# Altium PCB PCB_EPM7064SLC44_2.PCBDOC (part 2 of 2)
Units mil, origin at the board's own origin, x right, y up, seen from the top; angles counter-clockwise.
Board outline 2000 x 2000 mil, 2 copper layers (Top Layer, Bottom Layer); 30 components, 43 nets, 175 pads, 47 vias.
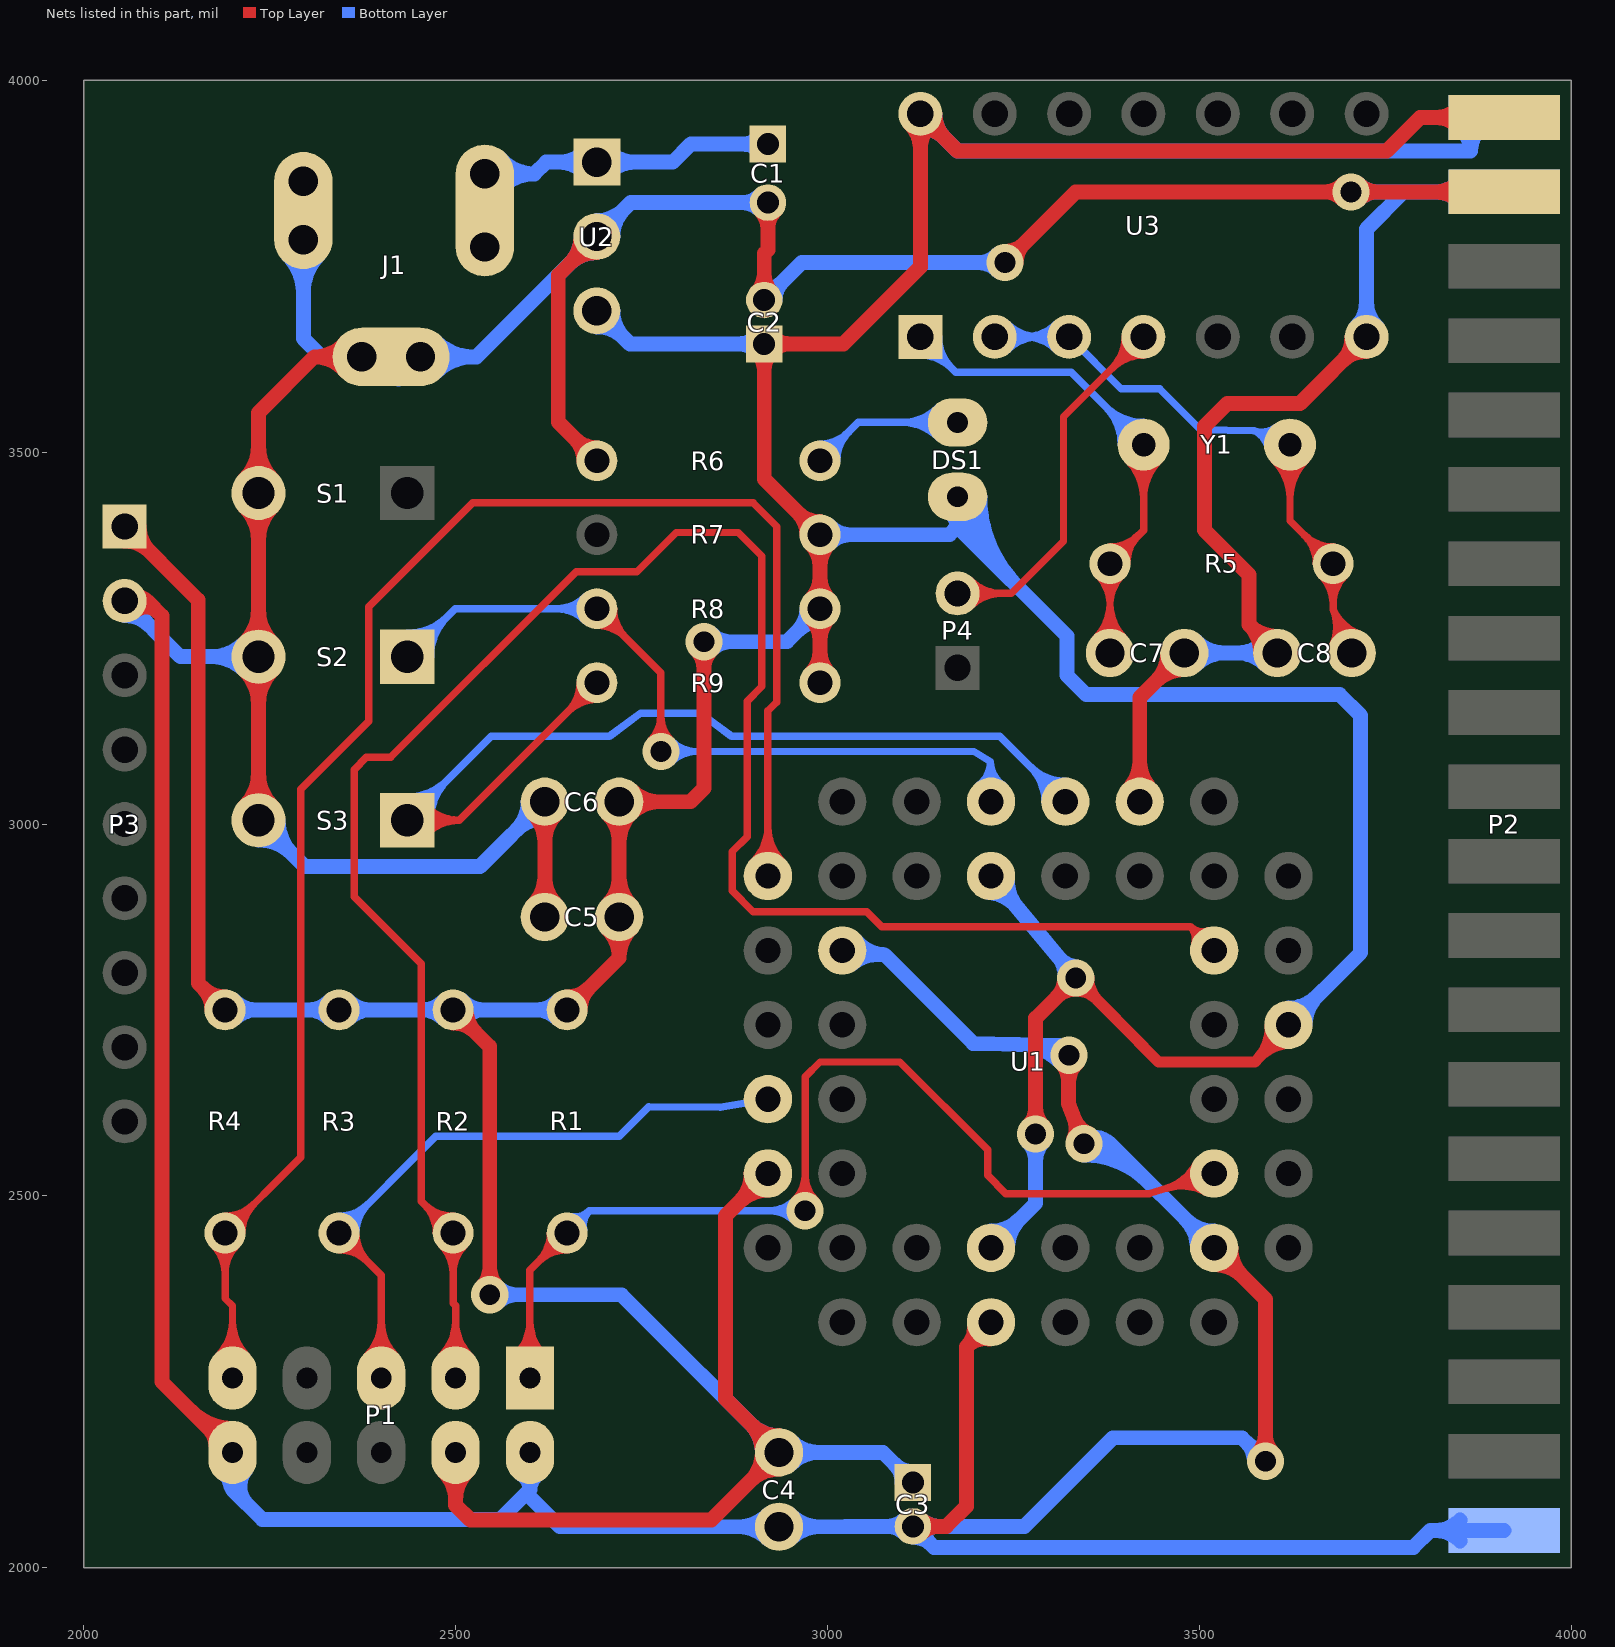
[diagram p2: the nets of this part, all layers, seen from the top]

## Via types
v1: diameter 50, hole 28, Top Layer to Bottom Layer, 47 vias

## Nets (pads, with @x,y where several pads share a name; then routed paths per layer and width w, separated by ;. In a path a pad name is that pad's centre, name@x,y a point inside that pad or via, vN(x,y) a via of type N, cw(c..) or ccw(c..) an arc to the next point about the centre after c; other vN are vias at no path point) (continued)
GND: C1.2 C2.2 C3.2 C4.1 C5.1 C6.1 C7.1 C8.1 J1.2 J1.2A J1.2B J1.3 J1.3A J1.3B P1.2 P1.10 P2.2 P2.22 P2.40 P3.2 R6.2 S1.2 S2.2 S3.2 U1.10 U1.22 U1.30 U1.42 U2.2 U3.7 | length 16637.8
  Top Layer w20: P3.2@2054.68,3300.35 cw(c2069.65,3284.11) 2085.27,3299.73 ; P3.2@2054.88,3300.46 cw(c2065.7,3259.79) 2095.45,3289.55 ; P3.2@2055,3300 2085,3300 ; P3.2@2068.24,3285.64 cw(c2083.78,3268.78) 2100,3285 ; P3.2@2072.86,3292.1 cw(c2085,3286.72) 2085,3300 ; P3.2@2072.86,3307.9 ccw(c2085,3313.28) 2085,3300 ; 2144.52,2210.48 ccw(c2200,2265.96) P1.10@2200,2187.5 ; 2168.66,2186.34 cw(c2147.32,2165) P1.10@2177.5,2165 ; P1.10@2200,2155 2105,2250 2105,3280 2085,3300 ; S3.2@2216.32,3023.68 ccw(c2171.22,3068.78) 2235,3068.78 ccw(c2298.78,3068.78) S3.2@2253.68,3023.68 ; S2.2@2216.32,3206.32 cw(c2171.22,3161.22) 2235,3161.22 cw(c2298.78,3161.22) S2.2@2253.68,3206.32 ; S2.2@2216.32,3243.68 ccw(c2171.22,3288.78) 2235,3288.78 ccw(c2298.78,3288.78) S2.2@2253.68,3243.68 ; S1.2@2216.32,3426.32 cw(c2171.22,3381.22) 2235,3381.22 cw(c2298.78,3381.22) S1.2@2253.68,3426.32 ; S1.2@2216.32,3463.68 ccw(c2171.22,3508.78) 2235,3508.78 ccw(c2298.78,3508.78) S1.2@2253.68,3463.68 ; S3.2@2235,3005 S2.2@2235,3225 S1.2@2235,3445 2235,3553 2310.15,3628.15 ; J1.2A@2275.64,3805.36 2295.28,3785.72 J1.2@2295.28,3825 ; J1.2A@2281.47,3799.44 ccw(c2248.13,3832.77) 2295.28,3832.77 ccw(c2342.42,3832.77) J1.2A@2309.08,3799.44 ; J1.2B@2281.47,3850.56 cw(c2248.13,3817.23) 2295.28,3817.23 cw(c2342.42,3817.23) J1.2B@2309.08,3850.56 ; J1.2B@2315.14,3844.86 2295.45,3864.55 2295.28,3864.72 J1.2B@2295.28,3864.37 J1.2@2295.28,3825 ; J1.3A@2351.72,3609.03 ccw(c2310.15,3573.4) 2310.15,3628.15 ; J1.3A@2351.72,3647.27 cw(c2310.15,3682.9) 2310.15,3628.15 ; J1.3A@2360.21,3614.34 ccw(c2326.87,3581.01) 2326.87,3628.15 ccw(c2326.87,3675.29) J1.3A@2360.21,3641.96 ; J1.3A@2389.56,3616.33 cw(c2413.38,3598.23) J1.3@2413.39,3628.15 ; J1.3A@2389.56,3639.97 ccw(c2413.38,3658.07) J1.3@2413.39,3628.15 ; J1.3B@2437.21,3616.33 ccw(c2413.39,3598.23) J1.3@2413.39,3628.15 ; J1.3B@2437.21,3639.97 cw(c2413.39,3658.07) J1.3@2413.39,3628.15 ; J1.3B@2438.95,3614.34 ccw(c2405.61,3581.01) 2405.61,3628.15 ccw(c2405.61,3675.29) J1.3B@2438.95,3641.96 ; C5.1@2604.1,2890.9 ccw(c2565.73,2929.27) 2620,2929.27 ccw(c2674.27,2929.27) C5.1@2635.9,2890.9 ; C6.1@2604.1,3014.1 cw(c2565.73,2975.73) 2620,2975.73 cw(c2674.27,2975.73) C6.1@2635.9,3014.1 ; C5.1@2620,2875 C6.1@2620,3030 ; U2.2@2668.5,3790 cw(c2616.61,3790) 2653.3,3753.3 cw(c2690,3716.61) U2.2@2690,3768.5 ; R6.2@2672.44,3488.46 ccw(c2630.05,3488.46) 2660.02,3518.44 ccw(c2690,3548.41) R6.2@2690,3506.02 ; R6.2@2690,3488.46 2638,3540.46 2638,3738 U2.2@2690,3790 ; C2.2@2904.67,3714.86 ccw(c2879.74,3739.79) 2915,3739.79 ccw(c2950.26,3739.79) C2.2@2925.33,3714.86 ; C1.2@2909.67,3825.3 cw(c2884.74,3800.37) 2920,3800.37 cw(c2955.26,3800.37) C1.2@2930.33,3825.3 ; C2.2@2915,3704.53 2915,3767 2920,3772 C1.2@2920,3835.63 ; C3.2@3115,2055.47 3160,2055.47 3187,2082.47 3187,2297 ; C3.2@3125.33,2045.14 cw(c3150.26,2020.21) 3150.26,2055.47 cw(c3150.26,2090.73) C3.2@3125.33,2065.8 ; U1.22@3197.64,2327.46 cw(c3160.74,2323.27) 3187,2297 ; U1.22@3217.46,2307.64 ccw(c3213.27,2270.74) 3187,2297 ; U1.22@3220,2330 3187,2297 ; v1(3239,3755) 3333.65,3849.65 v1(3704,3850) P2.2@3910,3850 ; v1@3239,3770 ccw(c3239,3806.21) 3264.61,3780.61 ccw(c3290.21,3755) v1@3254,3755 ; v1@3314.23,2678.53 cw(c3288.23,2653.32) 3324.44,2652.77 cw(c3360.65,2652.21) v1@3335.44,2678.21 ; v1(3325,2688.97) 3324,2624 v1(3345,2570) ; v1@3331.27,2576.04 ccw(c3298.12,2590.63) 3331.87,2603.75 ccw(c3365.63,2616.88) v1@3351.04,2583.73 ; U1.42@3404.09,3045.91 ccw(c3365.68,3084.32) 3420,3084.32 ccw(c3474.32,3084.32) U1.42@3435.91,3045.91 ; U1.42@3420,3030 3420,3170 C7.1@3480,3230 ; C7.1@3457.52,3230 cw(c3403.25,3230) 3441.62,3191.62 cw(c3480,3153.25) C7.1@3480,3207.52 ; U1.30@3520,2407.5 cw(c3520,2353.18) 3558.41,2391.59 cw(c3596.82,2430) U1.30@3542.5,2430 ; U1.30@3520,2430 3589,2361 v1(3589,2143) ; v1@3578.39,2153.61 ccw(c3552.79,2179.21) 3589,2179.21 ccw(c3625.21,2179.21) v1@3599.61,2153.61 ; C8.1@3582.52,3230.16 ccw(c3529.54,3230.53) 3567,3268 ; C8.1@3604.84,3252.48 cw(c3604.47,3305.46) 3567,3268 ; C8.1@3605,3230 3567,3268 ; v1@3693.4,3839.38 ccw(c3667.82,3813.75) 3667.79,3849.97 ccw(c3667.75,3886.18) v1@3693.38,3860.6 ; U3.7@3705.47,3655 cw(c3658.33,3655) 3691.66,3621.66 cw(c3725,3588.33) U3.7@3725,3635.47 ; v1@3714.61,3839.39 cw(c3740.21,3813.79) 3740.21,3850 cw(c3740.21,3886.21) v1@3714.61,3860.61 ; U3.7@3725,3655 3635.47,3565.47 3537.65,3565.47 3507.04,3534.86 3507.04,3395.09 3567,3335.13 3567,3268 ; P2.2@3850.86,3835.86 ccw(c3816.72,3801.72) 3816.72,3850 ccw(c3816.72,3898.28) P2.2@3850.86,3864.14 ; J1.2@2295.28,3825 cw(c2265.36,3825) 2283.46,3801.18 ccw(c2265.36,3825) J1.2@2295.28,3825 ; J1.2@2295.28,3825 ccw(c2325.2,3825) 2307.09,3801.18 cw(c2325.2,3825) J1.2@2295.28,3825 ; J1.2@2295.28,3825 cw(c2325.2,3825) 2307.09,3848.82 ccw(c2325.2,3825) J1.2@2295.28,3825 ; J1.2@2295.28,3825 ccw(c2265.36,3825) 2283.46,3848.82 cw(c2265.36,3825) J1.2@2295.28,3825 ; 2310.15,3628.15 J1.3A@2374.02,3628.15 J1.3@2413.39,3628.15
  Bottom Layer w20: P3.2@2055,3280.47 cw(c2055,3233.33) 2088.34,3266.66 cw(c2121.67,3300) P3.2@2074.53,3300 ; P3.2@2055,3300 2130,3225 S2.2@2235,3225 ; P1.10@2200,2155 2200,2105 ; P1.10@2201.95,2143.43 ccw(c2226.87,2123.37) 2204.25,2100.75 ; S2.2@2216.32,3206.32 ccw(c2171.22,3161.22) 2171.22,3225 ccw(c2171.22,3288.78) S2.2@2216.32,3243.68 ; P1.10@2217.53,2130.89 ccw(c2244.32,2109.32) 2220,2085 ; S3.2@2235,2978.58 cw(c2235,2914.81) 2280.1,2959.9 cw(c2325.19,3005) S3.2@2261.42,3005 ; S3.2@2235,3005 2297.24,2942.76 2532.76,2942.76 C6.1@2620,3030 ; J1.2A@2274.51,3764.86 cw(c2224.37,3714.72) 2295.28,3714.72 cw(c2366.18,3714.72) J1.2A@2316.04,3764.86 ; J1.2A@2281.47,3771.82 cw(c2248.13,3738.49) 2295.28,3738.49 cw(c2342.42,3738.49) J1.2A@2309.08,3771.82 ; J1.2B@2281.47,3850.56 cw(c2248.13,3817.23) 2295.28,3817.23 cw(c2342.42,3817.23) J1.2B@2309.08,3850.56 ; J1.2A@2283.46,3801.18 ccw(c2265.36,3825) J1.2@2295.28,3825 ; J1.2B@2283.46,3848.82 cw(c2265.36,3825) J1.2@2295.28,3825 ; J1.2A@2307.09,3801.18 cw(c2325.2,3825) J1.2@2295.28,3825 ; J1.2B@2307.09,3848.82 ccw(c2325.2,3825) J1.2@2295.28,3825 ; J1.3A@2349.36,3612.18 ccw(c2320,3593.17) 2320,3628.15 ; J1.3A@2349.36,3644.12 cw(c2320,3663.13) 2320,3628.15 ; J1.3A@2360.21,3614.34 ccw(c2326.87,3581.01) 2326.87,3628.15 ccw(c2326.87,3675.29) J1.3A@2360.21,3641.96 ; J1.3A@2373.97,3628.62 cw(c2377.58,3593.15) J1.3@2402.79,3618.36 ; J1.3A@2384.43,3611.63 cw(c2396.58,3592.36) J1.3@2412.68,3608.47 ; J1.3A@2387.82,3614.34 cw(c2421.16,3581.01) 2421.16,3628.15 cw(c2421.16,3675.29) J1.3A@2387.82,3641.96 ; J1.3A@2393,3628.15 2403.19,3617.96 J1.3@2423.07,3598.07 ; J1.3B@2438.95,3614.34 ccw(c2405.61,3581.01) 2405.61,3628.15 ccw(c2405.61,3675.29) J1.3B@2438.95,3641.96 ; J1.3B@2466.56,3614.34 cw(c2499.9,3581.01) 2499.9,3628.15 cw(c2499.9,3675.29) J1.3B@2466.56,3641.96 ; J1.3B@2473.52,3607.38 cw(c2523.66,3557.24) 2523.66,3628.15 cw(c2523.66,3699.06) J1.3B@2473.52,3648.92 ; P1.2@2588.32,2125.77 cw(c2575.7,2105) 2600,2105 ; C6.1@2597.52,3030 cw(c2543.25,3030) 2581.62,2991.62 cw(c2620,2953.25) C6.1@2620,3007.52 ; P1.2@2600,2155 2600,2105 ; P1.2@2611.68,2125.77 ccw(c2624.3,2105) 2600,2105 ; U2.2@2668.5,3790 cw(c2616.61,3790) 2653.3,3753.3 cw(c2690,3716.61) U2.2@2690,3768.5 ; U2.2@2690,3811.5 ccw(c2690,3863.39) 2726.7,3826.7 ccw(c2763.39,3790) U2.2@2711.5,3790 ; C1.2@2909.67,3825.3 ccw(c2884.74,3800.37) 2884.74,3835.63 ccw(c2884.74,3870.89) C1.2@2909.67,3845.96 ; C2.2@2915,3704.53 2965.47,3755 v1(3239,3755) ; C2.2@2915,3719.13 ccw(c2915,3754.4) 2939.93,3729.46 ccw(c2964.87,3704.53) C2.2@2929.61,3704.53 ; C4.1@2919.1,2039.1 ccw(c2880.73,2000.73) 2880.73,2055 ccw(c2880.73,2109.27) C4.1@2919.1,2070.9 ; C1.2@2920,3835.63 2735.63,3835.63 U2.2@2690,3790 2528.15,3628.15 2320,3628.15 ; C4.1@2950.9,2039.1 cw(c2989.27,2000.73) 2989.27,2055 cw(c2989.27,2109.27) C4.1@2950.9,2070.9 ; U1.10@3020,2830 3077,2824 3196,2705 3311.47,2702.5 v1(3325,2688.97) ; U1.10@3034.16,2812.51 cw(c3068.33,2770.29) 3074.02,2824.31 cw(c3079.71,2878.33) U1.10@3037.49,2844.16 ; C3.2@3104.67,2045.14 ccw(c3079.74,2020.21) 3079.74,2055.47 ccw(c3079.74,2090.73) C3.2@3104.67,2065.8 ; C3.2@3115,2040.87 cw(c3115,2005.6) 3139.93,2030.54 cw(c3164.87,2055.47) C3.2@3129.61,2055.47 ; C3.2@3125.33,2045.14 cw(c3150.26,2020.21) 3150.26,2055.47 cw(c3150.26,2090.73) C3.2@3125.33,2065.8 ; v1@3228.39,3744.39 ccw(c3202.79,3718.79) 3202.79,3755 ccw(c3202.79,3791.21) v1@3228.39,3765.61 ; 3257.15,2703.68 cw(c3255.39,2622.31) v1@3314.17,2678.6 ; v1@3342.31,2574.22 cw(c3358.54,2548.77) 3379.89,2570.11 ; v1@3345,2555 cw(c3345,2434.29) 3430.36,2519.64 ; v1(3345,2570) 3380,2570 ; v1@3345,2575 cw(c3345,2502.57) 3396.21,2553.79 ; v1@3353.07,2557.35 cw(c3372.26,2527.26) 3397.5,2552.5 ; v1@3355.86,2559.66 cw(c3380,2536.67) 3380,2570 ; v1@3355.86,2580.34 ccw(c3380,2603.33) 3380,2570 ; C7.1@3480,3230 C8.1@3605,3230 ; C7.1@3495.9,3214.1 cw(c3534.27,3175.73) 3534.27,3230 cw(c3534.27,3284.27) C7.1@3495.9,3245.9 ; U1.30@3497.5,2430 ccw(c3443.18,2430) 3481.59,2468.41 ccw(c3520,2506.82) U1.30@3520,2452.5 ; U1.30@3520,2430 3380,2570 ; v1@3574,2143 ccw(c3537.79,2143) 3563.39,2168.61 ccw(c3589,2194.21) v1@3589,2158 ; v1(3589,2143) 3557.32,2174.68 3384.13,2174.68 3264.92,2055.47 C3.2@3115,2055.47 ; C8.1@3589.1,3214.1 ccw(c3550.73,3175.73) 3550.73,3230 ccw(c3550.73,3284.27) C8.1@3589.1,3245.9 ; v1(3704,3850) 3775,3850 ; U3.7@3711.19,3668.81 ccw(c3677.86,3702.14) 3725,3702.14 ccw(c3772.14,3702.14) U3.7@3738.81,3668.81 ; v1@3714.61,3839.39 cw(c3740.21,3813.79) 3740.21,3850 cw(c3740.21,3886.21) v1@3714.61,3860.61 ; U3.7@3725,3655 3725,3800 3775,3850 ; P2.40@3850.86,2035.86 ccw(c3816.72,2001.72) 3816.72,2050 ccw(c3816.72,2098.28) P2.40@3850.86,2064.14 ; P2.22@3850.86,3835.86 ccw(c3816.72,3801.72) 3816.72,3850 ccw(c3816.72,3898.28) P2.22@3850.86,3864.14 ; P2.40@3910,2050 3810.69,2050 3788,2027.31 3143.17,2027.31 C3.2@3115,2055.47 ; P2.22@3910,3850 3775,3850 ; 2200,2105 cw(c2224.3,2105) 2211.68,2125.77 ccw(c2224.3,2105) 2200,2105 ; 2200,2105 ccw(c2175.7,2105) 2188.32,2125.77 cw(c2175.7,2105) 2200,2105 ; 2200,2105 2240,2065 2560,2065 2595,2100 ; J1.2@2295.28,3825 J1.2A@2295.28,3785.63 2295.28,3652.87 2320,3628.15 ; 2595,2100 2640,2055 C4.1@2935,2055 3024,2055 3024.47,2055.47 C3.2@3115,2055.47 ; 2595,2100 2600,2105
NetC1_1: C1.1 J1.1 J1.1A J1.1B U2.1 | length 1037.4
  Top Layer w20: J1.1A@2525.56,3789.6 ccw(c2492.23,3822.93) 2539.37,3822.93 ccw(c2586.51,3822.93) J1.1A@2553.18,3789.6 ; J1.1B@2525.56,3860.4 cw(c2492.23,3827.07) 2539.37,3827.07 cw(c2586.51,3827.07) J1.1B@2553.18,3860.4 ; J1.1A@2539.37,3775.79 J1.1@2539.37,3825 J1.1B@2539.37,3874.21
  Bottom Layer w20: J1.1B@2539.37,3874.21 2606,3874.21 ; J1.1B@2553.18,3860.4 cw(c2586.51,3827.07) 2586.51,3874.21 cw(c2586.51,3921.36) J1.1B@2553.18,3888.02 ; J1.1B@2561.05,3854.4 cw(c2606,3813.32) 2606,3874.21 ; J1.1B@2561.05,3894.03 ccw(c2606,3935.1) 2606,3874.21 ; U2.1@2674.8,3874.8 ccw(c2638.1,3838.1) 2638.1,3890 ccw(c2638.1,3941.9) U2.1@2674.8,3905.2 ; U2.1@2705.2,3874.8 cw(c2741.9,3838.1) 2741.9,3890 cw(c2741.9,3941.9) U2.1@2705.2,3905.2 ; C1.1@2909.67,3904.04 ccw(c2884.74,3879.11) 2884.74,3914.37 ccw(c2884.74,3949.63) C1.1@2909.67,3924.7 ; C1.1@2920,3914.37 2816.37,3914.37 2792,3890 U2.1@2690,3890 2621.79,3890 2606,3874.21
NetC7_2: C7.2 R5.1 U3.1 Y1.1 | length 1623.2
  Top Layer w10: C7.2@3360.57,3249.43 ccw(c3313.66,3296.34) 3380,3296.34 ccw(c3446.34,3296.34) C7.2@3399.43,3249.43 ; R5.1@3364.05,3334.05 cw(c3325.54,3295.54) 3380,3295.54 cw(c3434.46,3295.54) R5.1@3395.95,3334.05 ; C7.2@3367.64,3242.36 ccw(c3337.8,3272.2) 3380,3272.2 ccw(c3422.2,3272.2) C7.2@3392.36,3242.36 ; R5.1@3371.12,3341.12 cw(c3349.68,3319.68) 3380,3319.68 cw(c3410.32,3319.68) R5.1@3388.88,3341.12 ; C7.2@3380,3230 R5.1@3380,3350 3425.19,3395.19 Y1.1@3425.19,3510.09 ; R5.1@3380,3362.56 ccw(c3380,3392.88) 3401.44,3371.44 ccw(c3422.88,3350) R5.1@3392.56,3350 ; R5.1@3380,3372.56 ccw(c3380,3427.02) 3418.51,3388.51 ccw(c3457.02,3350) R5.1@3402.56,3350 ; Y1.1@3403.98,3488.88 cw(c3352.76,3437.67) 3425.19,3437.67 cw(c3497.62,3437.67) Y1.1@3446.4,3488.88 ; Y1.1@3411.05,3495.95 cw(c3376.91,3461.81) 3425.19,3461.81 cw(c3473.47,3461.81) Y1.1@3439.33,3495.95
  Bottom Layer w10: U3.1@3125,3630.47 cw(c3125,3571.26) 3166.87,3613.13 cw(c3208.74,3655) U3.1@3149.53,3655 ; U3.1@3125,3640.47 cw(c3125,3605.4) 3149.8,3630.2 cw(c3174.6,3655) U3.1@3139.53,3655 ; U3.1@3125,3655 3172.5,3607.5 3327.78,3607.5 Y1.1@3425.19,3510.09 ; Y1.1@3395.19,3510.09 ccw(c3322.76,3510.09) 3373.98,3561.31 ccw(c3425.19,3612.52) Y1.1@3425.19,3540.09 ; Y1.1@3405.19,3510.09 ccw(c3356.91,3510.09) 3391.05,3544.24 ccw(c3425.19,3578.38) Y1.1@3425.19,3530.09
NetC8_2: C8.2 R5.2 U3.2 U3.3 Y1.2 | length 1782.7
  Top Layer w10: Y1.2@3600.83,3488.88 cw(c3549.61,3437.67) 3622.04,3437.67 cw(c3694.47,3437.67) Y1.2@3643.25,3488.88 ; Y1.2@3607.9,3495.95 cw(c3573.76,3461.81) 3622.04,3461.81 cw(c3670.32,3461.81) Y1.2@3636.18,3495.95 ; Y1.2@3622.04,3510.09 3622.04,3407.96 R5.2@3680,3350 3680,3289 ; R5.2@3657.44,3350 ccw(c3602.98,3350) 3641.49,3388.51 ccw(c3680,3427.02) R5.2@3680,3372.56 ; R5.2@3664.05,3334.05 cw(c3625.54,3295.54) 3680,3295.54 cw(c3734.46,3295.54) R5.2@3695.95,3334.05 ; R5.2@3667.44,3350 ccw(c3637.12,3350) 3658.56,3371.44 ccw(c3680,3392.88) R5.2@3680,3362.56 ; R5.2@3671.12,3341.12 cw(c3649.68,3319.68) 3680,3319.68 cw(c3710.32,3319.68) R5.2@3688.88,3341.12 ; C8.2@3679.79,3240.94 ccw(c3623.87,3265.21) 3680,3289 ; C8.2@3688.97,3236.96 ccw(c3653.39,3252.4) 3689.1,3267.53 ccw(c3724.8,3282.66) C8.2@3711.15,3246.36 ; C8.2@3705,3230 3680,3289 ; C8.2@3714.67,3255.72 cw(c3736.13,3312.78) 3680,3289
  Bottom Layer w10: U3.2@3225,3655 U3.3@3325,3655 3395,3585 3447,3585 3502.14,3529.86 3573,3529 ; U3.2@3235.27,3644.73 cw(c3260.07,3619.93) 3260.07,3655 cw(c3260.07,3690.07) U3.2@3235.27,3665.27 ; U3.2@3242.34,3637.66 cw(c3284.21,3595.79) 3284.21,3655 cw(c3284.21,3714.21) U3.2@3242.34,3672.34 ; U3.3@3307.66,3637.66 ccw(c3265.79,3595.79) 3265.79,3655 ccw(c3265.79,3714.21) U3.3@3307.66,3672.34 ; U3.3@3314.73,3644.73 ccw(c3289.93,3619.93) 3289.93,3655 ccw(c3289.93,3690.07) U3.3@3314.73,3665.27 ; Y1.2@3592.45,3505.15 ccw(c3561.84,3500.04) 3573,3529 ; Y1.2@3602.31,3506.8 ccw(c3581.91,3503.39) 3589.35,3522.7 ccw(c3596.79,3542) Y1.2@3609.63,3525.78 ; Y1.2@3603.42,3533.62 cw(c3584.17,3557.96) 3573,3529 ; Y1.2@3622.04,3510.09 3573,3529
NetDS1_2: DS1.2 R6.1 | length 510.2
  Bottom Layer w10: R6.1@2990,3488.46 3041.54,3540 DS1.2@3175,3540 ; R6.1@2990,3501.02 ccw(c2990,3531.34) 3011.44,3509.9 ccw(c3032.88,3488.46) R6.1@3002.56,3488.46 ; R6.1@2990,3511.02 ccw(c2990,3565.49) 3028.51,3526.97 ccw(c3067.02,3488.46) R6.1@3012.56,3488.46 ; DS1.2@3148.05,3520.55 ccw(c3101.11,3473.61) 3101.11,3540 ccw(c3101.11,3606.39) DS1.2@3148.05,3559.45 ; DS1.2@3155.13,3527.63 ccw(c3125.25,3497.75) 3125.25,3540 ccw(c3125.25,3582.25) DS1.2@3155.13,3552.37
NetP1_1: P1.1 R1.2 U1.32 | length 2066.1
  Top Layer w10: P1.1@2580.55,2284.45 ccw(c2533.61,2331.39) 2600,2331.39 ccw(c2666.39,2331.39) P1.1@2619.45,2284.45 ; P1.1@2587.63,2277.37 ccw(c2557.75,2307.25) 2600,2307.25 ccw(c2642.25,2307.25) P1.1@2612.37,2277.37 ; P1.1@2600,2255 2600,2400 R1.2@2650,2450 ; R1.2@2627.44,2450 cw(c2572.98,2450) 2611.49,2411.49 cw(c2650,2372.98) R1.2@2650,2427.44 ; R1.2@2637.44,2450 cw(c2607.12,2450) 2628.56,2428.56 cw(c2650,2407.12) R1.2@2650,2437.44 ; v1@2955.86,2494.14 ccw(c2921.72,2528.28) 2970,2528.28 ccw(c3018.28,2528.28) v1@2984.14,2494.14 ; v1(2970,2480) 2970,2660 2990,2680 3097.5,2680 3215.53,2561.97 3215.53,2527.47 3240,2503 3433,2503 U1.32@3520,2530 ; U1.32@3495.66,2542.81 cw(c3436.91,2573.73) 3456.59,2510.32 cw(c3476.27,2446.91) U1.32@3507.19,2505.66 ; U1.32@3504.51,2538.15 cw(c3467.13,2557.83) 3479.65,2517.48 cw(c3492.17,2477.13) U1.32@3511.85,2514.51
  Bottom Layer w10: R1.2@2650,2450 2680,2480 ; R1.2@2654.31,2472.14 ccw(c2659.77,2500.23) 2680,2480 ; R1.2@2672.14,2454.31 cw(c2700.23,2459.77) 2680,2480 ; v1@2955.86,2465.86 ccw(c2921.72,2431.72) 2921.72,2480 ccw(c2921.72,2528.28) v1@2955.86,2494.14 ; v1(2970,2480) 2680,2480
NetP1_3: P1.3 R2.2 U1.38 | length 3204.4
  Top Layer w10: R2.2@2474.11,2450 ccw(c2419.64,2450) 2458.16,2488.51 ccw(c2496.67,2527.02) R2.2@2496.67,2472.56 ; P1.3@2480.55,2284.45 ccw(c2433.61,2331.39) 2500,2331.39 ccw(c2566.39,2331.39) P1.3@2519.45,2284.45 ; R2.2@2480.71,2434.05 cw(c2442.2,2395.54) 2496.67,2395.54 cw(c2551.13,2395.54) R2.2@2512.62,2434.05 ; R2.2@2484.11,2450 ccw(c2453.79,2450) 2475.23,2471.44 ccw(c2496.67,2492.88) R2.2@2496.67,2462.56 ; P1.3@2487.63,2277.37 ccw(c2457.75,2307.25) 2500,2307.25 ccw(c2542.25,2307.25) P1.3@2512.37,2277.37 ; R2.2@2487.79,2441.12 cw(c2466.35,2419.68) 2496.67,2419.68 cw(c2526.99,2419.68) R2.2@2505.55,2441.12 ; P1.3@2500,2255 2500,2352 2496.67,2355.33 R2.2@2496.67,2450 2454,2492.67 2454,2812 2363.58,2902.42 2363.58,3073.12 2380,3089.54 2412.54,3089.54 2662,3339 2744,3339 2797,3392 2880,3392 2912,3360 2912,3185.11 2892,3165.11 2892,2983 2872,2963 2872,2910 2900,2882 3053,2882 3073,2862 3488,2862 ; U1.38@3493.78,2838.3 ccw(c3471.39,2845.39) 3488,2862 ; U1.38@3511.7,2856.22 cw(c3504.61,2878.61) 3488,2862 ; U1.38@3520,2830 3488,2862
NetP1_5: P1.5 R3.2 U1.13 | length 1303.5
  Top Layer w10: R3.2@2343.33,2427.44 cw(c2343.33,2372.98) 2381.84,2411.49 cw(c2420.36,2450) R3.2@2365.89,2450 ; R3.2@2343.33,2437.44 cw(c2343.33,2407.12) 2364.77,2428.56 cw(c2386.21,2450) R3.2@2355.89,2450 ; R3.2@2343.33,2450 2400,2393.33 P1.5@2400,2255 ; P1.5@2380.55,2284.45 ccw(c2333.61,2331.39) 2400,2331.39 ccw(c2466.39,2331.39) P1.5@2419.45,2284.45 ; P1.5@2387.63,2277.37 ccw(c2357.75,2307.25) 2400,2307.25 ccw(c2442.25,2307.25) P1.5@2412.37,2277.37
  Bottom Layer w10: R3.2@2343.33,2450 2473.33,2580 2720,2580 2760,2620 2856,2619 U1.13@2920,2630 ; R3.2@2343.33,2462.56 ccw(c2343.33,2492.88) 2364.77,2471.44 ccw(c2386.21,2450) R3.2@2355.89,2450 ; R3.2@2343.33,2472.56 ccw(c2343.33,2527.02) 2381.84,2488.51 ccw(c2420.36,2450) R3.2@2365.89,2450
NetP1_9: P1.9 R4.2 U1.7 | length 2824
  Top Layer w10: R4.2@2174.05,2434.05 cw(c2135.54,2395.54) 2190,2395.54 cw(c2244.46,2395.54) R4.2@2205.95,2434.05 ; P1.9@2180.55,2284.45 ccw(c2133.61,2331.39) 2200,2331.39 ccw(c2266.39,2331.39) P1.9@2219.45,2284.45 ; R4.2@2181.12,2441.12 cw(c2159.68,2419.68) 2190,2419.68 cw(c2220.32,2419.68) R4.2@2198.88,2441.12 ; P1.9@2187.63,2277.37 ccw(c2157.75,2307.25) 2200,2307.25 ccw(c2242.25,2307.25) P1.9@2212.37,2277.37 ; R4.2@2190,2462.56 ccw(c2190,2492.88) 2211.44,2471.44 ccw(c2232.88,2450) R4.2@2202.56,2450 ; R4.2@2190,2472.56 ccw(c2190,2527.02) 2228.51,2488.51 ccw(c2267.02,2450) R4.2@2212.56,2450 ; P1.9@2200,2255 2200,2352 2190,2362 R4.2@2190,2450 2292,2552 2292,3047 2383,3138 2383,3292 2523,3432 2900,3432 2932,3400 2932,3164 2920,3152 U1.7@2920,2930 ; U1.7@2900.55,2949.45 ccw(c2853.61,2996.39) 2920,2996.39 ccw(c2986.39,2996.39) U1.7@2939.45,2949.45 ; U1.7@2907.63,2942.37 ccw(c2877.75,2972.25) 2920,2972.25 ccw(c2962.25,2972.25) U1.7@2932.37,2942.37
NetP4_2: P4.2 U3.4 | length 787.2
  Top Layer w10: P4.2@3175,3310 3247.44,3310 3317.44,3380 3317.44,3547.44 U3.4@3425,3655 ; P4.2@3185.27,3299.73 cw(c3210.07,3274.93) 3210.07,3310 cw(c3210.07,3345.07) P4.2@3185.27,3320.27 ; P4.2@3192.34,3292.66 cw(c3234.21,3250.79) 3234.21,3310 cw(c3234.21,3369.21) P4.2@3192.34,3327.34 ; U3.4@3400.47,3655 cw(c3341.26,3655) 3383.13,3613.13 cw(c3425,3571.26) U3.4@3425,3630.47 ; U3.4@3410.47,3655 cw(c3375.4,3655) 3400.2,3630.2 cw(c3425,3605.4) U3.4@3425,3640.47
OE1: R9.1 S3.1 U1.44 | length 2001.2
  Top Layer w10: S3.1@2435,3005 2505,3005 ; S3.1@2451,2990.77 cw(c2482.72,2962.55) 2482.72,3005 cw(c2482.72,3047.45) S3.1@2451,3019.23 ; S3.1@2458.47,2984.12 cw(c2505,2942.73) 2505,3005 ; S3.1@2458.47,3025.88 ccw(c2505,3067.27) 2505,3005 ; R9.1@2667.44,3190 cw(c2612.98,3190) 2651.49,3151.49 cw(c2690,3112.98) R9.1@2690,3167.44 ; R9.1@2677.44,3190 cw(c2647.12,3190) 2668.56,3168.56 cw(c2690,3147.12) R9.1@2690,3177.44 ; R9.1@2690,3190 2505,3005
  Bottom Layer w10: S3.1@2435,3005 2548,3118 2707,3118 2749,3149 2829,3149 2871,3118 3232,3118 U1.44@3320,3030 ; S3.1@2435,3026.42 ccw(c2435,3078.12) 2471.56,3041.56 ccw(c2508.12,3005) S3.1@2456.42,3005 ; S3.1@2435,3036.42 ccw(c2435,3112.27) 2488.63,3058.63 ccw(c2542.27,3005) S3.1@2466.42,3005 ; U1.44@3292.5,3030 ccw(c3226.11,3030) 3273.05,3076.95 ccw(c3320,3123.89) U1.44@3320,3057.5 ; U1.44@3302.5,3030 ccw(c3260.25,3030) 3290.13,3059.87 ccw(c3320,3089.75) U1.44@3320,3047.5
OE2/GCLK2: R8.1 S2.1 U1.2 | length 1749.6
  Top Layer w10: R8.1@2690,3266.93 cw(c2690,3212.47) 2728.51,3250.98 cw(c2767.02,3289.49) R8.1@2712.56,3289.49 ; R8.1@2690,3276.93 cw(c2690,3246.61) 2711.44,3268.05 cw(c2732.88,3289.49) R8.1@2702.56,3289.49 ; R8.1@2690,3289.49 2776.04,3203.45 v1(2776.04,3097.5) ; v1@2761.9,3111.64 ccw(c2727.76,3145.78) 2776.04,3145.78 ccw(c2824.32,3145.78) v1@2790.18,3111.64
  Bottom Layer w10: S2.1@2435,3225 2499.49,3289.49 R8.1@2690,3289.49 ; S2.1@2435,3246.42 ccw(c2435,3298.12) 2471.56,3261.56 ccw(c2508.12,3225) S2.1@2456.42,3225 ; S2.1@2435,3256.42 ccw(c2435,3332.27) 2488.63,3278.63 ccw(c2542.27,3225) S2.1@2466.42,3225 ; R8.1@2674.05,3273.54 ccw(c2635.54,3235.03) 2635.54,3289.49 ccw(c2635.54,3343.95) R8.1@2674.05,3305.44 ; R8.1@2681.12,3280.61 ccw(c2659.68,3259.17) 2659.68,3289.49 ccw(c2659.68,3319.81) R8.1@2681.12,3298.37 ; v1(2776.04,3097.5) 3197,3097.5 3219,3084 ; v1@2790.18,3083.36 cw(c2824.32,3049.22) 2824.32,3097.5 cw(c2824.32,3145.78) v1@2790.18,3111.64 ; U1.2@3203.42,3051.94 ccw(c3179.73,3083.27) 3219,3084 ; U1.2@3209.45,3043.96 ccw(c3194.37,3063.9) 3219.36,3064.36 ccw(c3244.36,3064.82) U1.2@3230.03,3044.34 ; U1.2@3220,3030 3219,3084 ; U1.2@3235.76,3052.54 cw(c3258.27,3084.72) 3219,3084
VCC: C2.1 C3.1 C4.2 C5.2 C6.2 DS1.1 P1.4 P2.1 P2.21 P3.1 R1.1 R2.1 R3.1 R4.1 R7.2 R8.2 R9.2 U1.3 U1.15 U1.23 U1.35 U2.3 U3.14 | length 13113
  Top Layer w15: v1@3333.84,2775.5 cw(c3333.47,2733.25) 3363.61,2762.86 cw(c3393.75,2792.47) v1@3351.5,2792.84 ; v1(3334,2793) 3445,2680 3575,2680 U1.35@3620,2730 ; U1.35@3595.03,2728.69 cw(c3534.76,2725.51) 3579.62,2685.14 cw(c3624.49,2644.76) U1.35@3621.31,2705.03
  Top Layer w20: P3.1@2055,3380.47 cw(c2055,3333.33) 2088.34,3366.66 cw(c2121.67,3400) P3.1@2074.53,3400 ; P3.1@2055,3400 2154,3301 2154,2786 R4.1@2190,2750 ; R4.1@2172.44,2750 ccw(c2130.05,2750) 2160.02,2779.98 ccw(c2190,2809.95) R4.1@2190,2767.56 ; P1.4@2484.09,2129.09 cw(c2445.68,2090.68) 2500,2090.68 cw(c2554.32,2090.68) P1.4@2515.91,2129.09 ; R2.1@2496.67,2732.44 cw(c2496.67,2690.05) 2526.64,2720.02 cw(c2556.62,2750) R2.1@2514.22,2750 ; R2.1@2496.67,2750 2546,2700.67 v1(2546,2367) ; P1.4@2500,2155 2500,2084 2520,2064 2844,2064 C4.2@2935,2155 2863,2227 2863,2473 U1.15@2920,2530 ; v1@2535.39,2377.61 ccw(c2509.79,2403.21) 2546,2403.21 ccw(c2582.21,2403.21) v1@2556.61,2377.61 ; R1.1@2650,2750 2720,2820 C5.2@2720,2875 C6.2@2720,3030 2816,3030 2834,3048 v1(2834,3245) ; R1.1@2650,2767.56 ccw(c2650,2809.95) 2679.98,2779.98 ccw(c2709.95,2750) R1.1@2667.56,2750 ; C5.2@2704.1,2859.1 cw(c2665.73,2820.73) 2720,2820.73 cw(c2774.27,2820.73) C5.2@2735.9,2859.1 ; C5.2@2704.1,2890.9 ccw(c2665.73,2929.27) 2720,2929.27 ccw(c2774.27,2929.27) C5.2@2735.9,2890.9 ; C6.2@2704.1,3014.1 cw(c2665.73,2975.73) 2720,2975.73 cw(c2774.27,2975.73) 2735.9,3014.1 cw(c2774.27,2975.73) 2774.27,3030 cw(c2774.27,3084.27) C6.2@2735.9,3045.9 ; v1@2823.39,3234.39 cw(c2797.79,3208.79) 2834,3208.79 cw(c2870.21,3208.79) v1@2844.61,3234.39 ; U1.15@2897.5,2530 cw(c2843.18,2530) 2881.59,2491.59 cw(c2920,2453.18) U1.15@2920,2507.5 ; C2.1@2904.67,3635.14 cw(c2879.74,3610.21) 2915,3610.21 cw(c2950.26,3610.21) 2925.33,3635.14 cw(c2950.26,3610.21) 2950.26,3645.47 cw(c2950.26,3680.73) C2.1@2925.33,3655.8 ; C4.2@2935,2132.52 ccw(c2935,2078.25) 2896.62,2116.62 ccw(c2858.25,2155) 2912.52,2155 ccw(c2858.25,2155) 2896.62,2193.38 ccw(c2935,2231.75) C4.2@2935,2177.48 ; R7.2@2972.44,3388.98 ccw(c2930.05,3388.98) 2960.02,3418.95 ccw(c2990,3448.93) R7.2@2990,3406.53 ; R9.2@2977.58,3202.42 ccw(c2947.61,3232.39) 2990,3232.39 ccw(c3032.39,3232.39) R9.2@3002.42,3202.42 ; R8.2@2977.58,3277.07 cw(c2947.61,3247.1) 2990,3247.1 cw(c3032.39,3247.1) R8.2@3002.42,3277.07 ; R8.2@2977.58,3301.9 ccw(c2947.61,3331.88) 2990,3331.88 ccw(c3032.39,3331.88) R8.2@3002.42,3301.9 ; R7.2@2977.58,3376.56 cw(c2947.61,3346.58) 2990,3346.58 cw(c3032.39,3346.58) R7.2@3002.42,3376.56 ; R9.2@2990,3190 R8.2@2990,3289.49 R7.2@2990,3388.98 2915,3463.98 C2.1@2915,3645.47 3021.47,3645.47 3125,3749 U3.14@3125,3955 3175,3905 3752,3905 3797,3950 P2.1@3910,3950 ; U3.14@3111.19,3941.19 cw(c3077.86,3907.86) 3125,3907.86 cw(c3172.14,3907.86) U3.14@3138.81,3941.19 ; U3.14@3125,3935.47 cw(c3125,3888.33) 3158.34,3921.66 cw(c3191.67,3955) U3.14@3144.53,3955 ; v1@3269.39,2593.61 ccw(c3243.79,2619.21) 3280,2619.21 ccw(c3316.21,2619.21) v1@3290.61,2593.61 ; v1(3280,2583) 3280,2739 v1(3334,2793) ; v1@3319,2793 cw(c3282.79,2793) 3308.39,2767.39 cw(c3334,2741.79) v1@3334,2778 ; P2.1@3850.86,3935.86 ccw(c3816.72,3901.72) 3816.72,3950 ccw(c3816.72,3998.28) P2.1@3850.86,3964.14
  Bottom Layer w20: R4.1@2190,2750 R3.1@2343.33,2750 R2.1@2496.67,2750 R1.1@2650,2750 ; R4.1@2202.42,2737.58 cw(c2232.39,2707.61) 2232.39,2750 cw(c2232.39,2792.39) R4.1@2202.42,2762.42 ; R3.1@2330.92,2737.58 ccw(c2300.94,2707.61) 2300.94,2750 ccw(c2300.94,2792.39) R3.1@2330.92,2762.42 ; R3.1@2355.75,2737.58 cw(c2385.73,2707.61) 2385.73,2750 cw(c2385.73,2792.39) R3.1@2355.75,2762.42 ; R2.1@2484.25,2737.58 ccw(c2454.27,2707.61) 2454.27,2750 ccw(c2454.27,2792.39) R2.1@2484.25,2762.42 ; R2.1@2509.08,2737.58 cw(c2539.06,2707.61) 2539.06,2750 cw(c2539.06,2792.39) R2.1@2509.08,2762.42 ; v1(2546,2367) 2723,2367 C4.2@2935,2155 3074.53,2155 C3.1@3115,2114.53 ; v1@2556.61,2356.39 cw(c2582.21,2330.79) 2582.21,2367 cw(c2582.21,2403.21) v1@2556.61,2377.61 ; R1.1@2637.58,2737.58 ccw(c2607.61,2707.61) 2607.61,2750 ccw(c2607.61,2792.39) R1.1@2637.58,2762.42 ; U2.3@2690,3668.5 cw(c2690,3616.61) 2726.7,3653.3 cw(c2763.39,3690) U2.3@2711.5,3690 ; U2.3@2690,3690 2734.53,3645.47 C2.1@2915,3645.47 ; v1(2834,3245) 2945.51,3245 R8.2@2990,3289.49 ; v1@2844.61,3234.39 cw(c2870.21,3208.79) 2870.21,3245 cw(c2870.21,3281.21) v1@2844.61,3255.61 ; C2.1@2904.67,3635.14 ccw(c2879.74,3610.21) 2879.74,3645.47 ccw(c2879.74,3680.73) C2.1@2904.67,3655.8 ; C4.2@2912.52,2155 ccw(c2858.25,2155) 2896.62,2193.38 ccw(c2935,2231.75) C4.2@2935,2177.48 ; C4.2@2950.9,2139.1 cw(c2989.27,2100.73) 2989.27,2155 cw(c2989.27,2209.27) C4.2@2950.9,2170.9 ; R8.2@2972.44,3289.49 cw(c2930.05,3289.49) 2960.02,3259.51 cw(c2990,3229.54) R8.2@2990,3271.93 ; R7.2@2990,3388.98 3163.98,3388.98 3175,3400 ; R7.2@3002.42,3376.56 cw(c3032.39,3346.58) 3032.39,3388.98 cw(c3032.39,3431.37) R7.2@3002.42,3401.39 ; C3.1@3100.39,2114.53 ccw(c3065.13,2114.53) 3090.07,2139.46 ccw(c3115,2164.4) C3.1@3115,2129.13 ; U3.14@3125,3935.47 cw(c3125,3888.33) 3158.34,3921.66 cw(c3191.67,3955) U3.14@3144.53,3955 ; U3.14@3125,3955 3175,3905 3865,3905 ; DS1.1@3163.32,3420.77 cw(c3150.7,3400) 3175,3400 ; DS1.1@3165,3440 ccw(c3237.43,3440) 3186.21,3388.79 ; DS1.1@3166.59,3424.09 cw(c3146.29,3403.79) 3175,3403.79 ; 3175,3399.3 cw(c3195.1,3399.3) DS1.1@3189.16,3418.51 ; DS1.1@3175,3440 3175,3400 ; DS1.1@3185,3440 ccw(c3305.71,3440) 3220.36,3354.64 ; DS1.1@3186.68,3420.77 ccw(c3199.3,3400) 3175,3400 ; DS1.1@3205,3440 ccw(c3373.99,3440) 3254.5,3320.5 ; U1.3@3217.95,2907.59 cw(c3212.99,2853.5) 3254.74,2888.25 cw(c3296.5,2922.99) U1.3@3242.41,2927.95 ; U1.23@3220,2430 3280,2490 v1(3280,2583) ; U1.23@3220,2452.5 ccw(c3220,2506.82) 3258.41,2468.41 ccw(c3296.82,2430) U1.23@3242.5,2430 ; U1.3@3220,2930 v1(3334,2793) ; v1@3269.39,2572.39 cw(c3243.79,2546.79) 3280,2546.79 cw(c3316.21,2546.79) v1@3290.61,2572.39 ; v1@3319.06,2794.37 ccw(c3283,2797.67) 3310.84,2820.84 ccw(c3338.67,2844) v1@3335.37,2807.94 ; U1.35@3620,2730 3717,2827 3717,3146 3689,3174 3348,3174 3322,3200 3322,3253 3175,3400 ; U1.35@3620,2752.5 ccw(c3620,2806.82) 3658.41,2768.41 ccw(c3696.82,2730) U1.35@3642.5,2730 ; P2.21@3851.6,3935.15 cw(c3824.38,3905) 3865,3905 ; P2.21@3878.4,3935.15 ccw(c3905.62,3905) 3865,3905 ; P2.21@3910,3950 3865,3950 3865,3905
pads on no net: P1.6 P1.7 P1.8 P2.20 P2.23 P2.24 P2.25 P2.26 P2.27 P2.28 P2.29 P2.30 P2.31 P2.32 P2.35 P2.36 P2.39 U3.5 U3.6 U3.8 U3.9 U3.10 U3.11 U3.12 U3.13

## Polygon pours and split planes (outlines as drawn)
GND on Top Layer (hatched 45Degree grid 35 track 20): 2000,3999 3845,3999 3845,2000 2000,2000
GND on Bottom Layer (hatched 45Degree grid 35 track 20): 2000,3999 3842,3999 3842,2003 2000,2003

## Keep-outs
Keep-Out Layer:
  the board outline again, w10

## Silkscreen, mask and mechanical layers (free items; w line width, h text height)
Top Overlay:
  text "VCC" at 3835,3885 h30
  text "GND" at 3835,3785 h30
  text "4" at 3835,3690 h30
  text "5" at 3835,3585 h30
  text "6" at 3835,3485 h30
  text "8" at 3835,3390 h30
  text "GCLRn" at 2160,3355 h30
  text "VCC" at 2015,3335 h30
  text "9" at 3835,3290 h30
  text "GND" at 2015,3240 h30
  text "11" at 3835,3190 h30
  text "41" at 2015,3140 h30
  text "OE2" at 2160,3140 h30
  text "12" at 3835,3090 h30
  text "40" at 2015,3040 h30
  text "14" at 3835,2985 h30
  text "39" at 2015,2935 h30
  text "OE1" at 2160,2920 h30
  text "16" at 3835,2890 h30
  text "37" at 2015,2835 h30
  text "17" at 3835,2785 h30
  text "36" at 2015,2735 h30
  text "18" at 3835,2690 h30
  text "34" at 2015,2635 h30
  text "19" at 3835,2590 h30
  text "33" at 2015,2515 h30
  text "20" at 3835,2490 h30
  text "21" at 3835,2390 h30
  text "24" at 3835,2285 h30
  text "25" at 3835,2190 h30
  text "26" at 3835,2090 h30
  text "JTAG" at 2010,2020 h60
Bottom Overlay:
  text "VCC" at 3830,3885 h30
  text "GND" at 3830,3785 h30
  text "31" at 3830,2690 h30
  text "29" at 3830,2590 h30
  text "28" at 3830,2285 h30
  text "27" at 3830,2190 h30
  text "GND" at 3750,2010 h30

## Text inside footprints (layer, text, board x,y; h text height)
C1: Top Overlay "+" at 2890.47,4031.5 h59.06 r270
C2: Top Overlay "+" at 2944.53,3538.19 h59.06 r90
C3: Top Overlay "+" at 3085.47,2221.81 h59.06 r270
J1: Mechanical 1 "Alert PCB fab to slot details" at 2011.26,4063.82 h11.81; Mechanical 1 "Assign keep-out area to slot" at 2011.26,4083.5 h11.81; Mechanical 1 "Mech 1 - Slot cut-out" at 2011.26,4044.13 h11.81; Mechanical 1 "Mech 2 - Clearance, move to internal plane if present" at 2011.26,4024.44 h11.81
U2: Top Overlay "2" at 2539.41,3809.68 h59.06 r270; Top Overlay "1" at 2539.41,3899.84 h59.06 r270; Top Overlay "3" at 2539.41,3709.68 h59.06 r270